# Allegro board X4_test-1127.brd
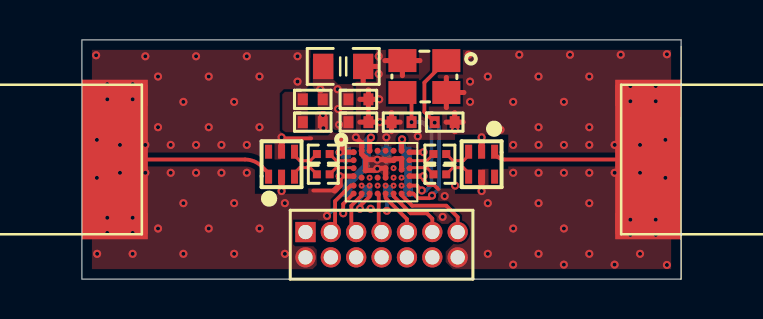
[diagram p0: board, top side]
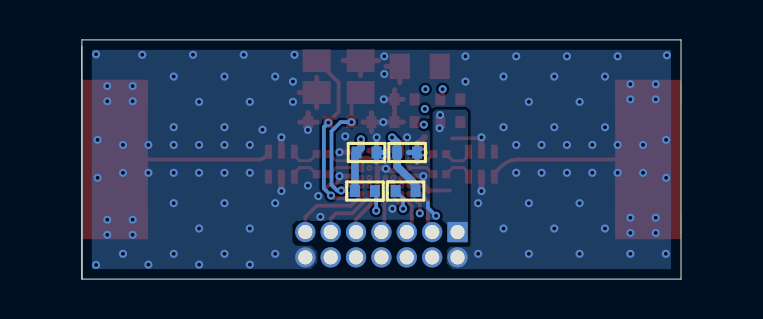
[diagram p1: board, bottom side, seen from below]

Outline 29.99 x 12 mm; copper layers: TOP, INNER1, INNER2, BOTTOM. Coordinates in mm from the lower left corner of the outline.
Outline path: 0,12 0,0 29.99,0 29.99,12 0,12

## Design rules (mm)
net group RF: nets N16937488 N16951744
net group RFIN_N: nets N16938729 RFIN_N
net group RFIN_P: nets N16939207 RFIN_P
net group RFOUT_N: nets N16963385 RFOUT_N
net group RFOUT_P: nets N16963398 RFOUT_P

## Placement (name value [footprint] x y rotation side)
C10  #VAL  [C0805]  13.08 10.67 0 top
C11  1uF  [C0402]  13.71 6.35 180 bottom
C12  1uF  [C0402]  13.84 7.87 0 top
C13  1uF  [C0402]  15.74 6.35 180 bottom
C14  1uF  [C0402]  13.84 9.02 0 top
C15  1uF  [C0402]  18.16 7.87 0 top
C16  1uF  [C0402]  16 7.87 180 top
NOREF  -  []  0 12 0 top
NOREF#2  -  []  0 0 90 top
P1  #VAL  [SIP14_1R27MM]  15.63 1.73 0 top
R1  -  [R0201]  12.08 5.26 180 top
R2  -  [R0201]  12.08 6.27 180 top
R3  0R  [R0402]  13.79 4.42 180 bottom
R4  0R  [R0402]  15.82 4.42 0 bottom
R100  0R  [R0402]  11.55 7.87 0 top
R102  0R  [R0402]  11.55 9.02 0 top
R106  -  [R0201]  17.92 5.26 0 top
R107  -  [R0201]  17.92 6.27 0 top
SMA1  -  [SMA]  0 6 180 top
SMA2  -  [SMA]  29.99 6 0 top
T1  bal-uwb-01e3  [BAL-UWB-01E3]  9.99 5.76 90 top
T2  bal-uwb-01e3  [BAL-UWB-01E3]  20.01 5.76 270 top
U101  -  [XETHRU_X4]  15 5.36 0 top
Y100  #VAL  [SMD5032]  17.14 10.16 180 top

## Library data of the parts
C10 = C0805: Tolerance: 22uF; tolerance: 22uF
C11 = C0402: Tolerance: 100nF; tolerance: 100nF
C12 = C0402: Tolerance: 10nF; tolerance: 10nF
C13 = C0402: Tolerance: 1nF; tolerance: 1nF
C14 = C0402: Tolerance: 100pF; tolerance: 100pF
C15 C16 = C0402: Tolerance: 12pF; tolerance: 12pF
P1 = SIP14_1R27MM: Tolerance: M50-3600842; tolerance: M50-3600842
R1 R2 R106 R107 = R0201: tolerance: 0R
R3 = R0402: Tolerance: 10K; tolerance: 10K
R4 = R0402: Tolerance: 100K; tolerance: 100K
R100 R102 = R0402
SMA1 SMA2 = SMA
T1 T2 = BAL-UWB-01E3: User Part Number: NCAB
U101 = XETHRU_X4: tolerance: XeThru_X4
Y100 = SMD5032: Tolerance: 27MHz; tolerance: 27MHz

## Footprints (pads in the part's own frame, mm; a bottom-side part is the same pattern mirrored in y, then rotated)
BAL-UWB-01E3
  rect 0.7x0.35 smd: 1(-0.625,0.65) 2(-0.625,0) 3(-0.625,-0.65) 4(0.625,0) 5(0.625,0.65) 6(0.625,-0.65)
C0402
  rect 0.5x0.6 smd: 1(-0.5,0) 2(0.5,0)
C0805
  rect 1.016x1.27 smd: 1(-1,0) 2(1,0)
R0201
  rect 0.4x0.4 smd: 1(-0.32,0) 2(0.32,0)
R0402
  rect 0.5x0.6 smd: 1(-0.5,0) 2(0.5,0)
SIP14_1R27MM
  rect 1.016x1.016 hole 0.711: 1(-4.445,0.635)
  round 1.016 hole 0.711: 2(-4.445,-0.635) 3(-3.175,0.635) 4(-3.175,-0.635) 5(-1.905,0.635) 6(-1.905,-0.635) 7(-0.635,0.635) 8(-0.635,-0.635) 9(0.635,0.635) 10(0.635,-0.635) 11(1.905,0.635) 12(1.905,-0.635) 13(3.175,0.635) 14(3.175,-0.635)
SMA
  oval 1.3x0.3 smd: 1(-0.65,0)
  rect 3.3x1.3 smd: 2(-1.65,3.35) 3(-1.65,-3.35)
  rect 3.3x7.5 smd: 4(-1.65,0)
SMD5032
  rect 1.4x1.15 smd: 1(-1.1,-0.8) 2(1.1,-0.8) 3(1.1,0.8) 4(-1.1,0.8)
XETHRU_X4
  round 0.3 smd: A1(-1.398,1) A2(-0.997,1.074) A3(-0.597,1.074) A4(-0.198,1.074) A5(0.202,1.074) A6(0.602,1.074) A7(1.003,1.074) A8(1.403,1) B1(-1.398,0.6) B3(-0.798,0.714) B5(0.202,0.6) B6(0.602,0.6) B7(1.003,0.674) B8(1.403,0.6) C1(-1.398,0.2) C3(-0.798,0.086) C5(0.202,0.2) C6(0.602,0.2) C7(1.003,0.126) C8(1.403,0.2) D1(-1.398,-0.2) D2(-0.997,-0.274) D3(-0.597,-0.274) D4(-0.198,-0.274) D5(0.202,-0.274) D6(0.602,-0.274) D7(1.003,-0.274) D8(1.403,-0.2) E1(-1.398,-0.674) E2(-0.997,-0.674) E3(-0.597,-0.674) E4(-0.198,-0.674) E5(0.202,-0.674) E6(0.602,-0.674) E7(1.003,-0.674) E8(1.403,-0.674) F1(-1.398,-1.074) F2(-0.997,-1.074) F3(-0.597,-1.074) F4(-0.198,-1.074) F5(0.202,-1.074) F6(0.602,-1.074) F7(1.003,-1.074) F8(1.403,-1.074)

## Nets
GND: C10.2 C11.2 C12.2 C13.2 C14.2 C15.2 C16.2 P1.2 P1.14 SMA1.2 SMA1.3 SMA1.4 SMA2.2 SMA2.3 SMA2.4 T1.2 T1.4 T2.2 T2.4 U101.A1 U101.A2 U101.A8 U101.B3 U101.B5 U101.B6 U101.B7 U101.C3 U101.C5 U101.C7 U101.D1 U101.D5 U101.D8 U101.E3 U101.E6 Y100.2 Y100.4
VDD3V: C10.1 C11.1 C12.1 C13.1 C14.1 R3.2 R4.2 R102.2 U101.A3 U101.A7 U101.C6 U101.D6 U101.D7 U101.E4 U101.E7
VDD_IN: P1.1 R100.2
VDD_X4: R100.1 R102.1
QSPI_IO0/SPI_MOSI: P1.5 U101.F2
QSPI_IO1/SPI_MISO: P1.10 R3.1 U101.F3
QSPI_IO2: P1.7 U101.F4
QSPI_IO3: P1.9 U101.F5
QSPI_NSS/SPI_NSS: P1.8 U101.E2
QSPI_SCLK/SPI_SCLK: P1.6 U101.F1
RFIN_N: R1.1 U101.C1
RFIN_P: R2.1 U101.B1
RFOUT_N: R106.1 U101.C8
RFOUT_P: R107.1 U101.B8
X4_ENABLE: P1.12 R4.1 U101.E5
X4_GPIO5: P1.11 U101.F6
X4_GPIO6: P1.13 U101.F7
X4_IO1: P1.3 U101.E1
X4_IO2: P1.4 U101.D3
XIN27: C15.1 U101.F8 Y100.1
XOUT27: C16.1 U101.E8 Y100.3
N16937488: SMA1.1 T1.1
N16938729: R1.2 T1.3
N16939207: R2.2 T1.6
N16951744: SMA2.1 T2.1
N16963385: R106.2 T2.6
N16963398: R107.2 T2.3

Pads without a net: T1 5; T2 5; U101 A4 A5 A6 D2 D4

## Via types
v1: diameter 0.406, hole 0.203, TOP to BOTTOM, 135 vias
v2: diameter 0.254, hole 0.102, TOP to INNER1, 10 vias

## Routing (per net, layer and track width the routed paths; a pad name or vN(x,y) marks a point on that pad's centre or on a via; arc(x,y) is an arc through that point)
GND: length 36.1
  TOP w0.188: v1(9.99,7.11) 10.04,7.06 11.48,7.06 ; 17.83,4.52 17.62,4.72 17.34,4.72 17.1,4.97 v1(17.1,5.16) ; 11.58,4.44 12.65,4.44
  TOP w0.254: 14.08,9.85 C10.2 14.76,10.67 ; 18.24,8.61 Y100.4 ; Y100.4 19.12,9.36 ; Y100.4 18.24,10.11 ; 13.91,7.87 C12.2 ; C12.2 14.34,8.35 ; C12.2 14.77,7.87 ; U101.B3 14,6.28 U101.A2 14,6.82 v1(13.71,7.11) ; U101.B3 14.29,5.99 v1(14.78,5.99) 15.17,5.99 U101.B5 U101.B6 15.67,6.04 U101.B7 U101.C7 ; U101.B3 U101.C3 14.24,5.45 14.25,5.46 14.7,5.46 v1(14.78,5.54) 14.81,5.56 U101.C5 U101.D5 ; C16.2 15.5,8.35 ; C16.2 15.07,7.87 ; C16.2 15.5,7.39 ; C16.2 15.93,7.87 ; U101.A8 v1(17.1,6.36) ; 13.91,9.02 C14.2 ; C14.2 14.34,8.54 ; C14.2 14.34,9.49 ; C14.2 14.77,9.02 ; 15.16,10.96 Y100.2 ; Y100.2 16.04,10.21 ; Y100.2 16.92,10.96 ; U101.D8 v1(17.1,5.16) ; U101.D1 v1(12.9,5.16) ; C15.2 19.09,7.87 ; C15.2 18.66,7.39 ; C15.2 18.66,8.35 ; C15.2 18.23,7.87 ; U101.A1 v1(12.9,6.36)
  TOP w0.305: T1.2 v1(9.99,4.42) ; T2.2 v1(20.01,7.11) ; T2.4 v1(20.01,4.42) ; 12.65,4.44 12.9,4.7 v1(12.9,5.16) ; 12.82,7.11 12.85,7.11 13,6.96 13,6.47 v1(12.9,6.36) ; T1.4 v1(9.99,7.11)
  INNER1 w0.127: v1(14.78,5.54) 14.78,5.07 v2(14.4,4.69) 14.11,4.98 13.89,4.98 13.69,4.77 13.69,4.65
  BOTTOM w0.188: 12.67,3.83 12.67,3.58 v1(12.26,3.17)
  BOTTOM w0.254: 14.82,6.35 C13.2 ; C13.2 15.24,6.83 ; C13.2 15.24,5.87 ; 13.21,5.87 C11.2 ; C11.2 12.78,6.35 ; C11.2 13.21,6.83 ; C11.2 13.64,6.35
  vias: v1(0.71,11.23) v1(0.75,6.98) v1(0.75,5.08) v1(0.76,1.27) v1(1.27,9.78) v1(1.27,9.02) v1(1.27,3.08) v1(1.27,2.32) v1(1.9,6.73) v1(1.9,5.33) v1(2.54,9.78) v1(2.54,9.02) v1(2.54,3.08) v1(2.54,2.32) v1(2.54,1.27) v1(3.17,11.17) v1(3.17,6.73) v1(3.17,5.33) v1(3.81,10.16) v1(3.81,7.62) v1(3.81,2.54) v1(4.44,6.73) v1(4.44,5.33) v1(5.08,8.89) v1(5.08,3.81) v1(5.08,1.27) v1(5.71,11.17) v1(5.71,6.73) v1(5.71,5.33) v1(6.35,10.16) v1(6.35,7.62) v1(6.35,2.54) v1(6.98,6.73) v1(6.98,5.33) v1(7.62,8.89) v1(7.62,3.81) v1(7.62,1.27) v1(8.25,11.17) v1(8.25,6.73) v1(8.25,5.33) v1(8.89,10.16) v1(8.89,7.62) v1(8.89,2.54) v1(10.16,3.81) v1(10.16,1.27) v1(10.79,11.17) v1(10.79,9.9) v1(14.45,3.53) v1(14.86,11.17) v1(14.86,10.29) v1(14.88,9.02) v1(14.91,7.87) v1(15.24,7.11) v1(16.81,7.16) v1(18.06,3.12) v1(18.16,4.16) v1(18.68,7.48) v1(18.68,4.69) v1(19.35,11.25) v1(19.43,9.9) v1(19.43,8.89) v1(20.32,10.16) v1(20.32,3.81) v1(20.32,1.27) v1(20.95,7.49) v1(21.59,8.89) v1(21.59,6.73) v1(21.59,5.33) v1(21.59,2.54) v1(21.58,0.73) v1(21.89,11.25) v1(22.86,10.16) v1(22.86,7.62) v1(22.86,6.73) v1(22.86,5.33) v1(22.86,3.81) v1(22.86,1.27) v1(24.13,8.89) v1(24.13,6.73) v1(24.13,5.33) v1(24.13,2.54) v1(24.12,0.73) v1(24.43,11.25) v1(25.4,10.16) v1(25.4,7.62) v1(25.4,6.73) v1(25.4,5.33) v1(25.4,3.81) v1(25.4,1.27) v1(26.67,6.73) v1(26.67,5.33) v1(26.66,0.73) v1(26.97,11.25) v1(27.45,9.68) v1(27.45,8.92) v1(27.45,2.98) v1(27.45,2.22) v1(27.94,6.73) v1(27.94,5.33) v1(27.94,1.27) v1(28.72,9.68) v1(28.72,8.92) v1(28.72,2.98) v1(28.72,2.22) v1(29.21,6.98) v1(29.21,5.08) v1(29.28,11.28) v1(29.28,0.71) v2(15.6,4.69)
VDD3V: length 7.7
  TOP w0.254: U101.A3 14.4,7.04 v1(14.47,7.1) ; v1(16.02,7.01) 16,6.98 U101.A7
  INNER1 w0.127: v2(14.8,4.69) 14.8,4.72 15.13,5.05
  BOTTOM w0.381: v1(14.47,7.1) 14.21,6.85 C11.1 14.21,5.65 13.29,4.73 R3.2 ; v1(16.02,7.01) 16.02,6.57 C13.1 16.32,6.27 R4.2
  vias: v1(11.93,9.52) v1(12.8,9.52) v1(12.82,8.53) v1(12.87,7.75) v2(15.6,5.56) v2(15.6,5.09) v2(16,5.09) v2(16,4.69)
VDD_IN: length 0.7
  TOP w0.188: v1(12.06,8.23) 12.05,8.22 R100.2 12.05,7.6 v1(12.09,7.57)
QSPI_IO0/SPI_MOSI: length 2.2
  TOP w0.188: U101.F2 14,4.2 13.48,3.68 13.48,2.61 P1.5
QSPI_IO1/SPI_MISO: length 6.1
  TOP w0.188: v1(13.92,3.53) 13.92,3.66 14.4,4.14 U101.F3
  INNER1 w0.127: P1.10 15.62,1.74 15.62,2.92 15.49,3.05 14.32,3.05 13.92,3.45 v1(13.92,3.53)
  BOTTOM w0.188: v1(13.92,3.53) 13.92,4.04 R3.1
QSPI_IO2: length 2
  TOP w0.188: U101.F4 14.86,4.23 14.86,2.5 P1.7
QSPI_IO3: length 2.4
  TOP w0.188: P1.9 16.27,3.01 15.2,4.07 U101.F5
QSPI_NSS/SPI_NSS: length 4.6
  INNER1 w0.127: P1.8 14.35,1.74 14.35,2.67 13.99,3.02 13.72,3.02 13.46,3.28 13.46,3.7 14,4.24 v2(14,4.69)
QSPI_SCLK/SPI_SCLK: length 3.7
  TOP w0.188: v1(13.08,3.3) 13.08,3.77 U101.F1
  INNER1 w0.127: P1.6 13.08,1.74 v1(13.08,3.3)
RFIN_N: length 1.3
  TOP w0.145: R1.1 12.73,5.59 13.57,5.59 U101.C1
RFIN_P: length 1.3
  TOP w0.145: U101.B1 13.57,5.94 12.73,5.94 R2.1
RFOUT_N: length 1.3
  TOP w0.145: R106.1 17.26,5.59 16.42,5.59 U101.C8
RFOUT_P: length 1.3
  TOP w0.145: R107.1 17.26,5.94 16.42,5.94 U101.B8
X4_ENABLE: length 6.3
  INNER1 w0.127: 15.25,3.42 v1(15.26,3.43) ; 15.25,3.42 16.39,3.42 16.89,2.92 16.89,1.74 P1.12 ; 15.25,3.42 15.2,3.42 v2(15.2,4.69)
  BOTTOM w0.188: R4.1 15.26,4.36 v1(15.26,3.43)
X4_GPIO5: length 3.2
  TOP w0.188: P1.11 17.54,3.03 17.27,3.3 16.46,3.3 15.6,4.16 U101.F6
X4_GPIO6: length 4.1
  TOP w0.188: P1.13 18.81,3.11 18.24,3.68 16.53,3.68 16,4.21 U101.F7
X4_IO1: length 2.9
  TOP w0.188: P1.3 12.67,2.57 12.67,3.91 13.45,4.69 U101.E1
X4_IO2: length 5.9
  INNER1 w0.127: P1.4 11.85,1.7 11.85,3.27 13.81,5.23 14.26,5.23 v2(14.4,5.09)
XIN27: length 9
  TOP w0.188: U101.F8 16.58,4.29 16.82,4.06 17.39,4.06 v1(17.52,4.19) ; Y100.1 17.14,9.86 17.14,8.39 C15.1 v1(17.66,7.85)
  BOTTOM w0.188: v1(17.52,4.19) 17.88,4.55 17.88,7.63 v1(17.66,7.85)
XOUT27: length 6.9
  TOP w0.188: v1(16.5,7.87) 16.5,8.9 Y100.3 ; v1(17.01,4.44) 16.77,4.69 U101.E8
  BOTTOM w0.188: v1(17.01,4.44) 17.22,4.44 17.5,4.72 17.5,7.42 17.04,7.87 v1(16.5,7.87)
N16937488: length 9.1
  TOP w0.188: T1.1 9.34,5.31 9,5.65 arc(8.61,5.91) 8.16,6 SMA1.1
N16938729: length 1.6
  TOP w0.145: T1.3 10.64,5.33 10.9,5.59 11.43,5.59 R1.2
N16939207: length 1.6
  TOP w0.145: R2.2 11.43,5.94 10.9,5.94 10.64,6.2 T1.6
N16951744: length 8.9
  TOP w0.188: SMA2.1 21.15,6 arc(20.96,6.04) 20.8,6.15 20.66,6.29 T2.1
N16963385: length 1.6
  TOP w0.145: T2.6 19.36,5.33 19.1,5.59 18.57,5.59 R106.2
N16963398: length 1.6
  TOP w0.145: R107.2 18.57,5.94 19.1,5.94 19.36,6.2 T2.3

## Copper pours and planes (outline as drawn; the poured copper is in the pictures)
GND on TOP: 0.5,0.5 0.5,11.5 29.49,11.5 29.49,0.5 18.56,0.5 18.56,0.51 18.21,0.86 18.21,1.37 18.61,1.78 18.61,2.59 18.44,2.77 17.75,2.77 17.57,2.59 17.57,0.5 12.69,0.5 13.25,1.07 13.25,1.9 12.21,2.94 10.61,2.94 10.56,2.89 10.56,1.75 10.66,1.65 11.58,1.65 11.76,1.47 11.76,0.71 11.55,0.5 ; 2 cut-outs
GND on BOTTOM: 0.5,0.5 0.5,11.5 29.49,11.5 29.49,0.5 18.54,0.5 18.21,0.84 18.21,1.37 18.51,1.67 19.27,1.67 19.45,1.85 19.45,2.72 19.25,2.92 17.7,2.92 17.65,2.87 17.65,1.9 17.57,1.83 17.57,0.53 17.6,0.5 12.74,0.5 12.8,0.56 12.8,2.21 17.62,2.21 17.62,2.97 12.42,2.97 12.42,2.67 12.39,2.69 10.99,2.69 10.54,2.23 10.54,1.7 10.61,1.62 11.55,1.62 11.73,1.45 11.73,0.79 11.45,0.5 ; 2 cut-outs
GND on INNER1: 14.54,1.94 14.54,1.82 14.75,1.61 14.78,1.62 15.21,1.62 15.52,1.34 15.52,0.85 15.46,0.76 15.39,0.68 15.37,0.57 15.45,0.5 12.29,0.5 12.29,1.64 12.95,1.38 12.85,0.68 12.83,0.57 12.91,0.5 13.28,0.5 13.36,0.57 13.33,0.68 13.17,0.97 13.2,1.31 13.21,1.34 12.89,1.66 12.89,1.77 12.84,1.86 12.74,1.86 12.49,1.79 12.23,1.84 11.96,2.11 10.92,2.11 10.56,1.75 10.56,1.7 10.61,1.65 11.45,1.65 11.81,1.29 11.81,0.84 11.47,0.5 0.5,0.5 0.5,11.5 29.49,11.5 29.49,0.5 18.44,0.5 18.21,0.74 18.21,1.95 18.08,2.08 18.08,2.41 18,2.49 15.77,2.49 15.52,2.23 15.52,1.57 15.43,1.66 15.43,1.77 15.38,1.86 15.28,1.86 14.94,1.79 14.62,1.93 14.61,1.94 ; 1 cut-out
GND on INNER2: 0.5,0.5 0.5,11.5 29.49,11.5 29.49,0.5 18.32,0.5 18.13,0.68 18.13,1.37 17.88,1.62 12.04,1.62 11.78,1.37 11.78,0.76 11.53,0.51 11.53,0.5
VDD3V on TOP: 11.81,8.63 12.32,8.63 12.57,8.38 12.57,7.57 12.67,7.47 13.51,7.47 13.59,7.54 13.59,9.65 13.46,9.78 12.82,9.78 12.57,10.03 12.57,11.05 12.44,11.17 11.68,11.17 11.55,11.05 11.55,9.65 11.81,9.4
VDD3V on INNER1: 14.98,4.93 14.98,5.08 15.08,5.18 15.08,6.12 13.86,7.34 12.59,7.34 12.38,7.55 12.38,8.42 11.68,9.12 11.68,9.65 11.93,9.9 13.64,9.9 14.8,8.74 16.1,8.74 16.15,8.69 16.15,7.64 16.37,7.43 16.37,6.69 16.15,6.48 16.15,5.33 16.46,5.03 16.46,4.6 16.4,4.55 15.92,4.55 15.85,4.62 15.85,4.77 15.69,4.93
VDD_IN on BOTTOM: 11.68,1.9 11.68,2.69 12.44,3.45 12.44,8.33 12.26,8.51 10.79,8.51 10.66,8.38 10.66,1.9
VDD_X4 on TOP: 11.17,9.4 10.16,9.4 10.03,9.27 10.03,7.49 10.16,7.36 11.17,7.36 11.3,7.49 11.3,9.27

Small or netless copper shapes (teardrops, artwork), in the pictures only: 1 on TOP
